# EAGLE board Unibook Breakout (EAGLE 9.3.0)
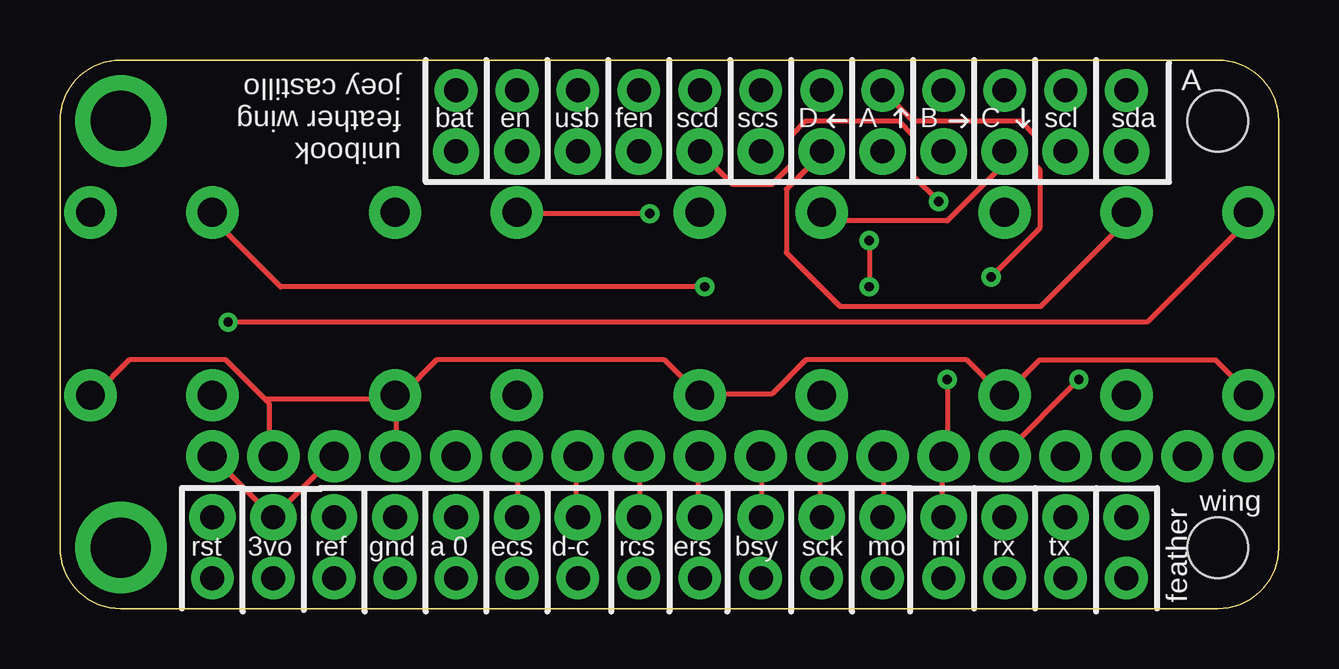
[diagram p0: board, top side]
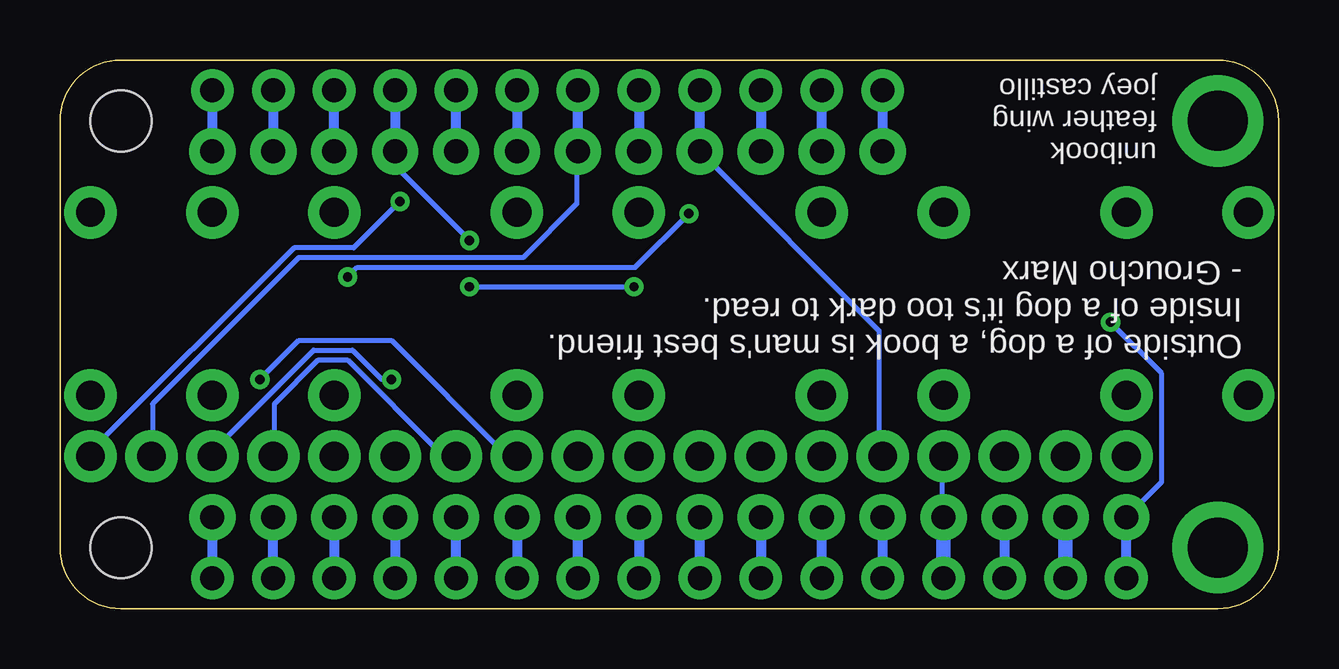
[diagram p1: board, bottom side, seen from below]

Size 50.8 x 22.86 mm. Coordinates in mm from the lower left corner, seen from the top.
Outline: 2.54,22.86 48.26,22.86 arc-90 50.8,20.32 50.8,2.54 arc-90 48.26,0 2.54,0 arc-90 0,2.54 0,20.32 arc-90 2.54,22.86
Copper layers (1*16): Top 0.035mm / dielectric 1.5mm / Bottom 0.035mm
Design rules "adafruit": minimum track width 8mil, minimum drill 15.5mil, track to track 8mil, track to pad 8mil, pad to pad 8mil, via to via 8mil, smd to smd 8mil, copper to edge 10mil, drill to drill 8mil, minimum pad ring 10mil, minimum via ring 8mil, stop-mask expansion 2mil, vias tented up to drill 20mil, thermal gap 10mil

## Footprints (pad centres in the part's own frame; a part is rotated, then mirrored left to right if it is on the bottom)
1X12_ROUND_76MIL = drill 1 pad 1.93: 1 -13.97,0; 2 -11.43,0; 3 -8.89,0; 4 -6.35,0; 5 -3.81,0; 6 -1.27,0; 7 1.27,0; 8 3.81,0; 9 6.35,0; 10 8.89,0; 11 11.43,0; 12 13.97,0
1X16_ROUND_76MIL = drill 1 pad 1.93: 1 -19.05,0; 2 -16.51,0; 3 -13.97,0; 4 -11.43,0; 5 -8.89,0; 6 -6.35,0; 7 -3.81,0; 8 -1.27,0; 9 1.27,0; 10 3.81,0; 11 6.35,0; 12 8.89,0; 13 11.43,0; 14 13.97,0; 15 16.51,0; 16 19.05,0
FEATHERWING = drill 1 pad 1.778: 1 6.35,1.27; 2 8.89,1.27; 3 11.43,1.27; 4 13.97,1.27; 5 16.51,1.27; 6 19.05,1.27; 7 21.59,1.27; 8 24.13,1.27; 9 26.67,1.27; 10 29.21,1.27; 11 31.75,1.27; 12 34.29,1.27; 13 36.83,1.27; 14 39.37,1.27; 15 41.91,1.27; 16 44.45,1.27; 17 44.45,21.59; 18 41.91,21.59; 19 39.37,21.59; 20 36.83,21.59; 21 34.29,21.59; 22 31.75,21.59; 23 29.21,21.59; 24 26.67,21.59; 25 24.13,21.59; 26 21.59,21.59; 27 19.05,21.59; 28 16.51,21.59 | drill 2.5 pad 3.81: P$1 2.54,20.32; P$2 2.54,2.54 | hole 2.54: 48.26,20.32; 48.26,2.54

## Placement (x,y rotation side)
JP1  [1X12_ROUND_76MIL]  30.48,19.05 0 top
JP3  [1X16_ROUND_76MIL]  25.4,3.81 180 top
MS1  FEATHERWING  [FEATHERWING]  0,0 0 top

## Library data of the parts
JP1 JP3 MS1 = microbuilder

## Nets
3V: JP3.15 MS1.2
AREF: JP3.14 MS1.3
GND: JP3.13 MS1.4
N$1: JP1.2 MS1.27
N$2: JP3.1 MS1.16
N$3: JP1.4 MS1.25
N$4: JP3.2 MS1.15
N$5: JP1.5 MS1.24
N$6: JP3.3 MS1.14
N$7: JP3.4 MS1.13
N$8: JP3.5 MS1.12
N$9: JP3.6 MS1.11
N$10: JP3.7 MS1.10
N$11: JP3.8 MS1.9
N$12: JP3.9 MS1.8
N$13: JP3.10 MS1.7
N$14: JP3.11 MS1.6
N$15: JP3.12 MS1.5
N$18: JP3.16 MS1.1
N$19: JP1.6 MS1.23
N$20: JP1.7 MS1.22
N$21: JP1.8 MS1.21
N$22: JP1.9 MS1.20
N$23: JP1.10 MS1.19
N$24: JP1.11 MS1.18
N$25: JP1.12 MS1.17
USB: JP1.3 MS1.26
VBAT: JP1.1 MS1.28

## Tracks (layer width: path | path; a pad name or v marks a point on that pad's centre or on a via)
3V  (via drill 1.2 pad 2.18)
  Top 0.203: v11.43,6.35 JP3.15 v6.35,6.35
  Bottom 0.61: JP3.15 MS1.2
AREF
  Bottom 0.406: JP3.14 MS1.3
GND  (via drill 1.2 pad 2.18)
  Top 0.203: v13.97,6.35 14.02,6.5 14.02,8.74 v13.97,8.89 | 8.53,8.74 8.74,8.53 8.74,6.5 v8.89,6.35 | 8.53,8.74 6.91,10.36 2.9,10.36 1.47,8.94 1.42,8.94 v1.27,8.89 | 8.53,8.74 13.82,8.74 v13.97,8.89 | v49.53,8.89 49.53,8.99 48.16,10.36 40.84,10.36 v39.37,8.89 39.22,8.94 37.8,10.36 31.09,10.36 29.67,8.94 26.82,8.94 v26.67,8.89 25.2,10.36 15.7,10.36 14.28,8.94 14.02,8.94 v13.97,8.89
  Bottom 0.203: v13.97,6.35 14.02,6.3 14.02,4.06 JP3.13
  Bottom 0.61: JP3.13 MS1.4
N$1
  Bottom 0.406: JP1.2 MS1.27
N$2
  Bottom 0.406: JP3.1 MS1.16
N$3  (via drill 1.2 pad 2.18)
  Bottom 0.203: JP1.4 16.66,11.58 16.66,6.5 v16.51,6.35
  Bottom 0.406: JP1.4 MS1.25
N$4
  Bottom 0.406: MS1.15 JP3.2
N$5  (via drill 0.39, 1.2 pad 2.18)
  Top 0.203: v36.63,16.97 35.56,18.03 35.56,19.71 34.95,20.32 31.09,20.32 30.48,19.71 30.48,18.49 29.67,17.68 28.04,17.68 JP1.5
  Bottom 0.203: v49.53,6.35 49.53,6.55 41.05,15.04 38.56,15.04 v36.63,16.97
  Bottom 0.406: MS1.24 JP1.5
N$6
  Bottom 0.406: JP3.3 MS1.14
N$7  (via drill 0.39, 1.2 pad 2.18)
  Top 0.203: JP3.4 36.78,3.86 36.78,6.3 v36.83,6.35 36.98,6.5 v36.98,9.55
  Bottom 0.203: v36.98,9.55 37.39,9.55 38.61,10.77 40.23,10.77 44.5,6.5 v44.45,6.35
  Bottom 0.406: JP3.4 MS1.13
N$8  (via drill 1.2 pad 2.18)
  Top 0.203: v34.29,6.35 34.34,6.3 34.34,3.86 JP3.5
  Bottom 0.203: v34.29,6.35 34.34,6.5 34.95,6.5 38.81,10.36 40.03,10.36 41.86,8.53 41.86,6.5 v41.91,6.35
  Bottom 0.406: MS1.12 JP3.5
N$9  (via drill 0.39, 1.2 pad 2.18)
  Top 0.203: v31.75,6.35 31.7,6.3 31.7,3.86 JP3.6 | v42.47,9.55 39.42,6.5 v39.37,6.35
  Bottom 0.203: v42.47,9.55 40.84,11.18 36.98,11.18 32.31,6.5 31.9,6.5 v31.75,6.35
  Bottom 0.406: JP3.6 MS1.11
N$10  (via drill 1.2 pad 2.18)
  Top 0.203: v29.21,6.35 29.26,6.3 29.26,3.86 JP3.7
  Bottom 0.406: MS1.10 JP3.7
N$11  (via drill 1.2 pad 2.18)
  Top 0.203: v26.67,6.35 26.62,6.3 26.62,3.86 JP3.8
  Bottom 0.406: JP3.8 MS1.9
N$12  (via drill 1.2 pad 2.18)
  Top 0.203: v24.13,6.35 24.18,6.3 24.18,3.86 JP3.9
  Bottom 0.406: MS1.8 JP3.9
N$13  (via drill 1.2 pad 2.18)
  Top 0.203: v21.59,6.35 21.54,6.3 21.54,3.86 JP3.10
  Bottom 0.406: JP3.10 MS1.7
N$14  (via drill 1.2 pad 2.18)
  Top 0.203: v19.05,6.35 19.1,6.3 19.1,3.86 JP3.11
  Bottom 0.406: MS1.6 JP3.11
N$15
  Bottom 0.406: JP3.12 MS1.5
N$16  (via drill 1.2 pad 2.18)
  other vias: 13.97,16.51
N$18  (via drill 0.39, 1.2 pad 2.18)
  Top 0.203: v49.53,16.51 49.53,16.15 45.31,11.94 v7.01,11.94
  Bottom 0.203: v7.01,11.94 4.88,9.8 4.88,5.28 JP3.16
  Bottom 0.406: MS1.1 JP3.16
N$19  (via drill 1.2 pad 2.18)
  Bottom 0.203: v46.99,6.35 46.94,6.5 46.94,8.53 40.84,14.63 31.5,14.63 29.26,16.87 29.26,18.9 JP1.6
  Bottom 0.406: JP1.6 MS1.23
N$20  (via drill 1.2 pad 2.18)
  Top 0.203: v44.45,16.51 44.45,16.15 40.89,12.6 32.51,12.6 30.28,14.83 30.28,17.48 31.7,18.9 JP1.7
  Bottom 0.406: MS1.22 JP1.7
N$21  (via drill 0.39, 1.2 pad 2.18)
  Top 0.203: v24.59,16.46 19.1,16.46 v19.05,16.51 | v38.81,13.82 40.84,15.85 40.84,18.29 40.64,18.49 40.64,19.71 40.03,20.32 35.56,20.32 MS1.21
  Bottom 0.203: v24.59,16.46 26.82,14.22 38.41,14.22 v38.81,13.82
  Bottom 0.406: JP1.8 MS1.21
N$22  (via drill 0.39, 1.2 pad 2.18)
  Top 0.203: v6.35,16.51 6.35,16.26 9.2,13.41 v26.87,13.41 | v33.73,15.34 v33.73,13.41
  Bottom 0.203: v33.73,13.41 v26.87,13.41 | v33.73,15.34 36.52,18.14 JP1.9
  Bottom 0.406: MS1.20 JP1.9
N$23  (via drill 1.2 pad 2.18)
  Top 0.203: v31.75,16.51 32.11,16.15 36.98,16.15 39.37,18.54 JP1.10
  Bottom 0.406: JP1.10 MS1.19
N$24
  Bottom 0.406: MS1.18 JP1.11
N$25
  Bottom 0.406: MS1.17 JP1.12
N$36  (via drill 1.2 pad 2.18)
  other vias: 1.27,16.51
N$45  (via drill 1.2 pad 2.18)
  other vias: 6.35,8.89
N$72  (via drill 1.2 pad 2.18)
  other vias: 19.05,8.89
N$88  (via drill 1.2 pad 2.18)
  other vias: 26.67,16.51
N$95  (via drill 1.2 pad 2.18)
  other vias: 31.75,8.89
N$109  (via drill 1.2 pad 2.18)
  other vias: 39.37,16.51
N$120  (via drill 1.2 pad 2.18)
  other vias: 44.45,8.89
USB
  Bottom 0.406: MS1.26 JP1.3
VBAT
  Bottom 0.406: MS1.28 JP1.1

## Text on the board
tPlace: unibook / feather wing / joey castillo | A | bat | en | usb | fen | scd | scs | D | A | B | C | scl | sda | wing | rst | 3vo | ref | gnd | a 0 | ecs | d-c | rcs | ers | bsy | sck | mo | mi | rx | tx | feather
bPlace: unibook / feather wing / joey castillo | Outside of a dog, a book is man's best friend. / Inside of a dog it's too dark to read. / - Groucho Marx